# Altium PCB Ninja_ECU_PCB.PcbDoc (part 1 of 3)
Units mm, origin at the board's own origin, x right, y up, seen from the top; angles counter-clockwise.
Board outline 80.01 x 89.03 mm, 4 copper layers (Top Layer, Signal Layer 1, Signal Layer 2, Bottom Layer), stack 0.778 mm thick; 215 components, 159 nets, 825 pads, 332 vias.
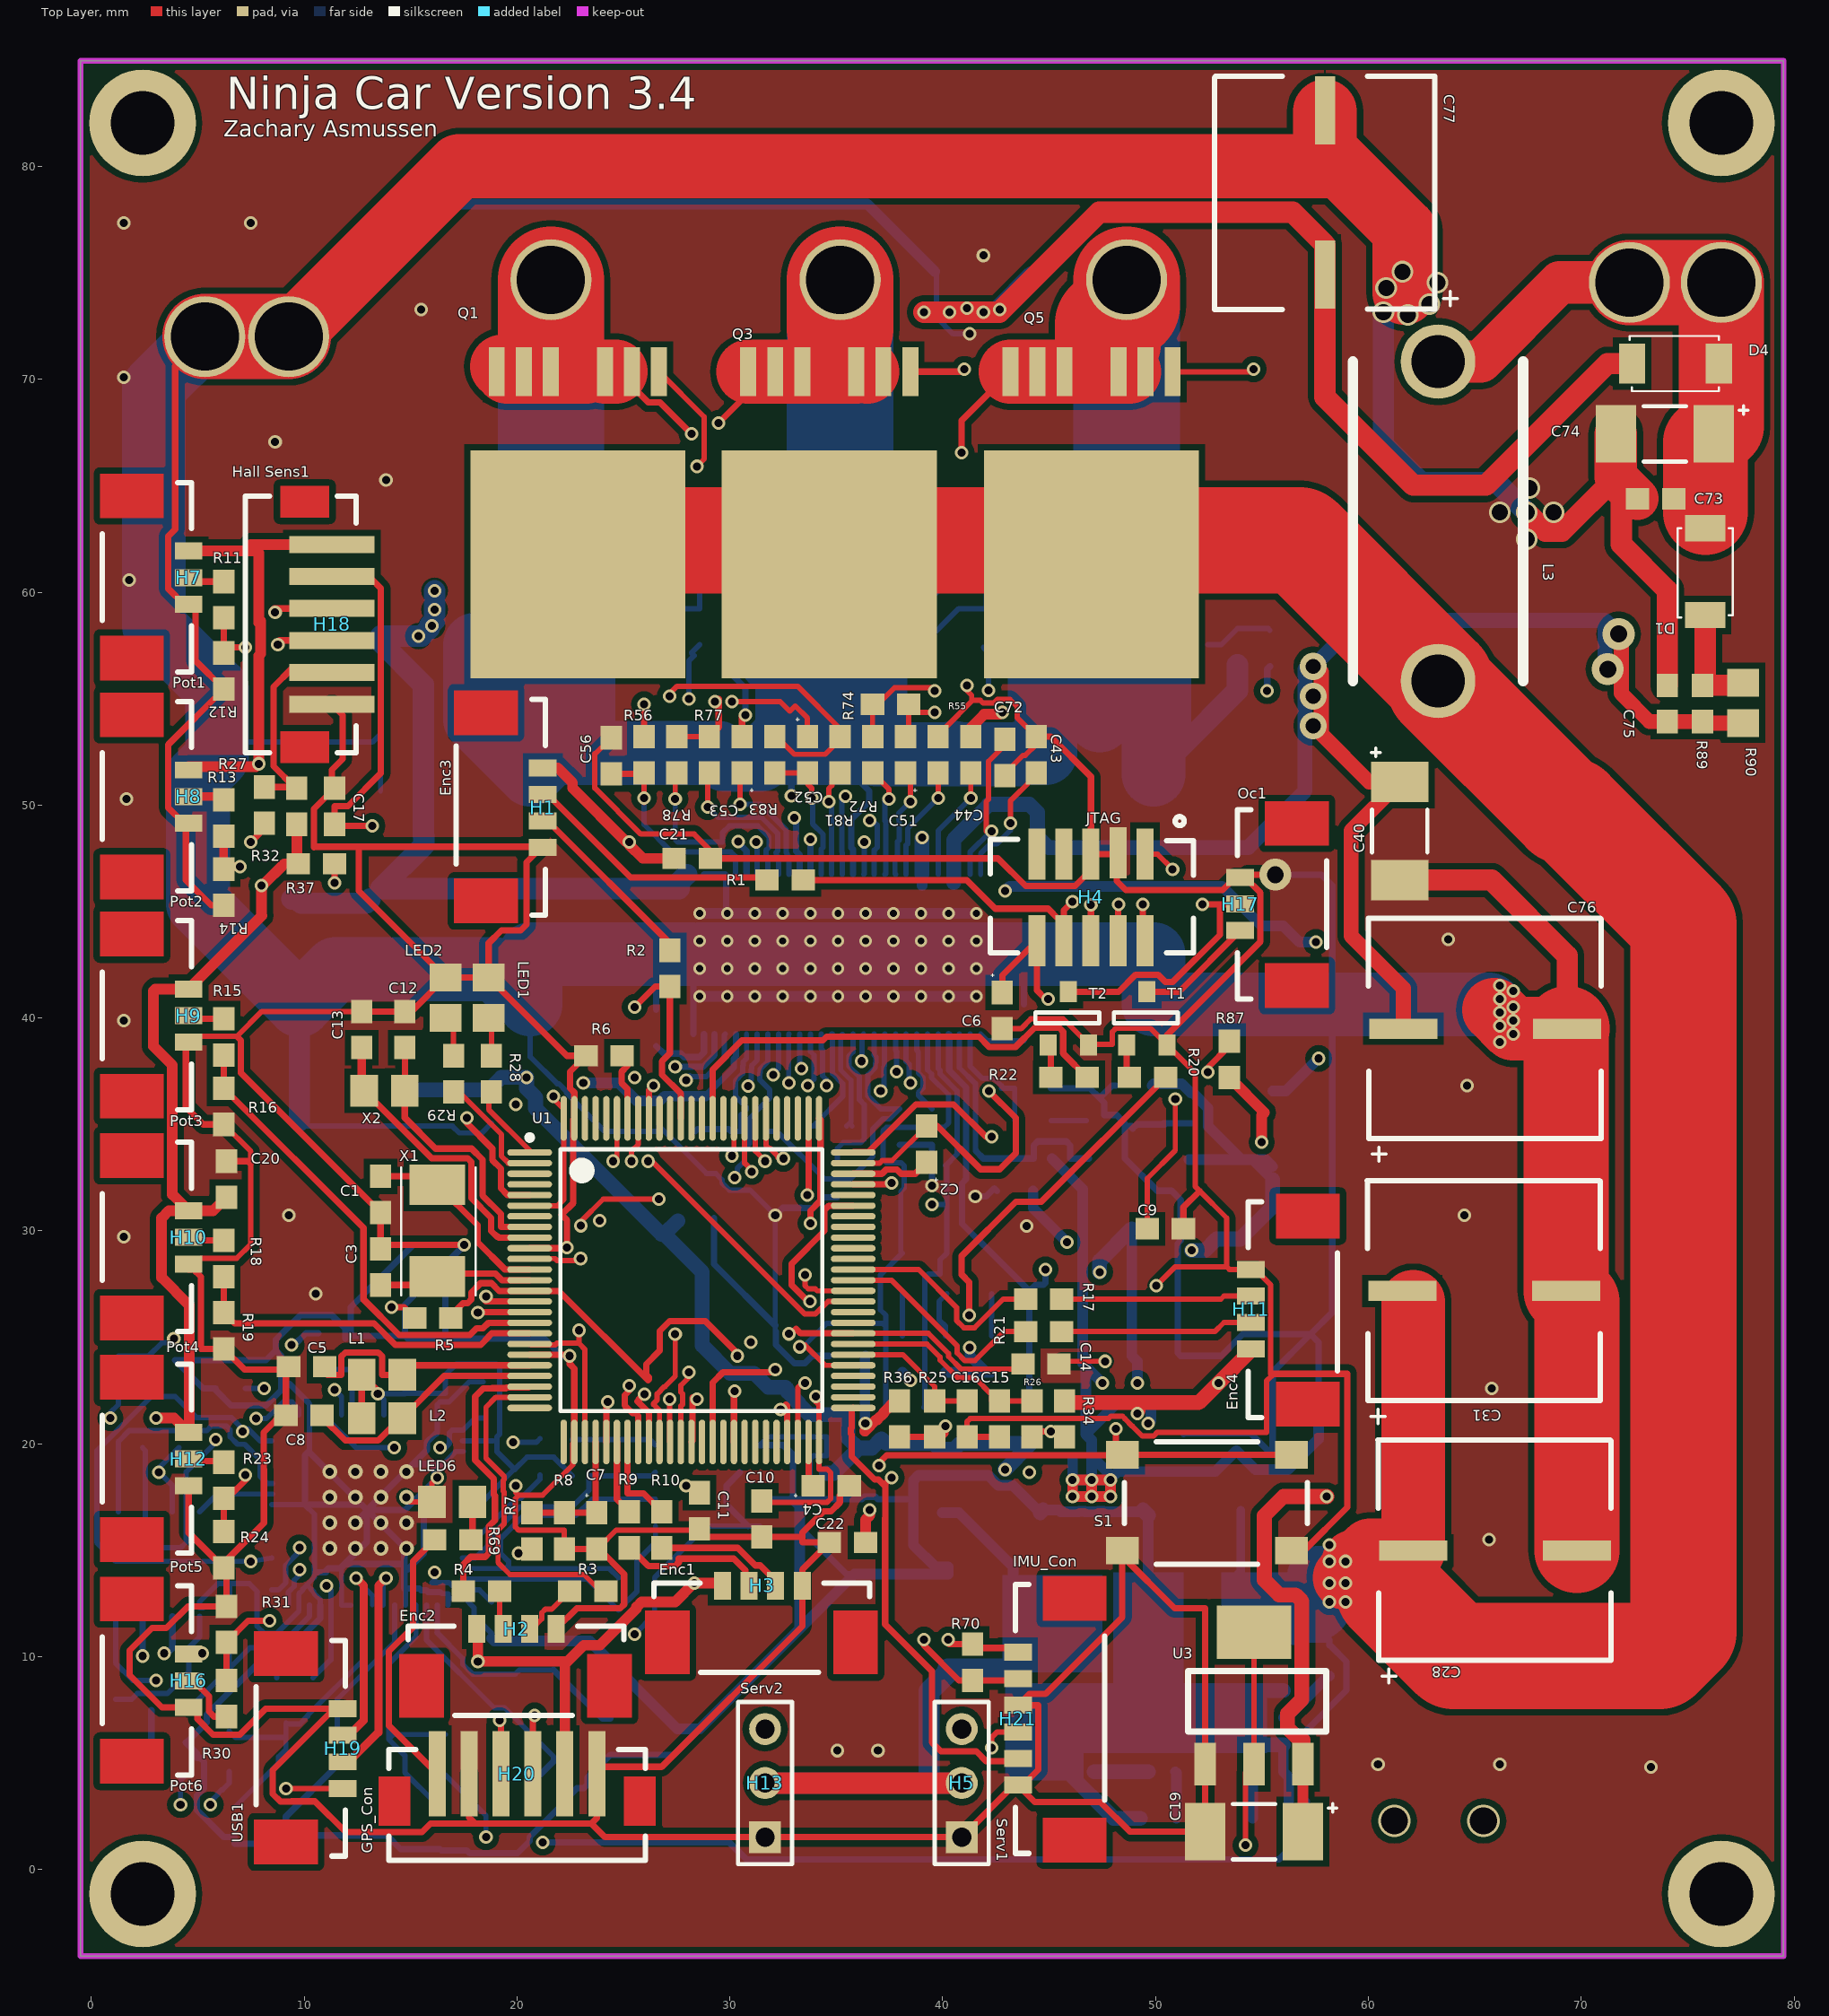
[diagram p0: Top Layer view]
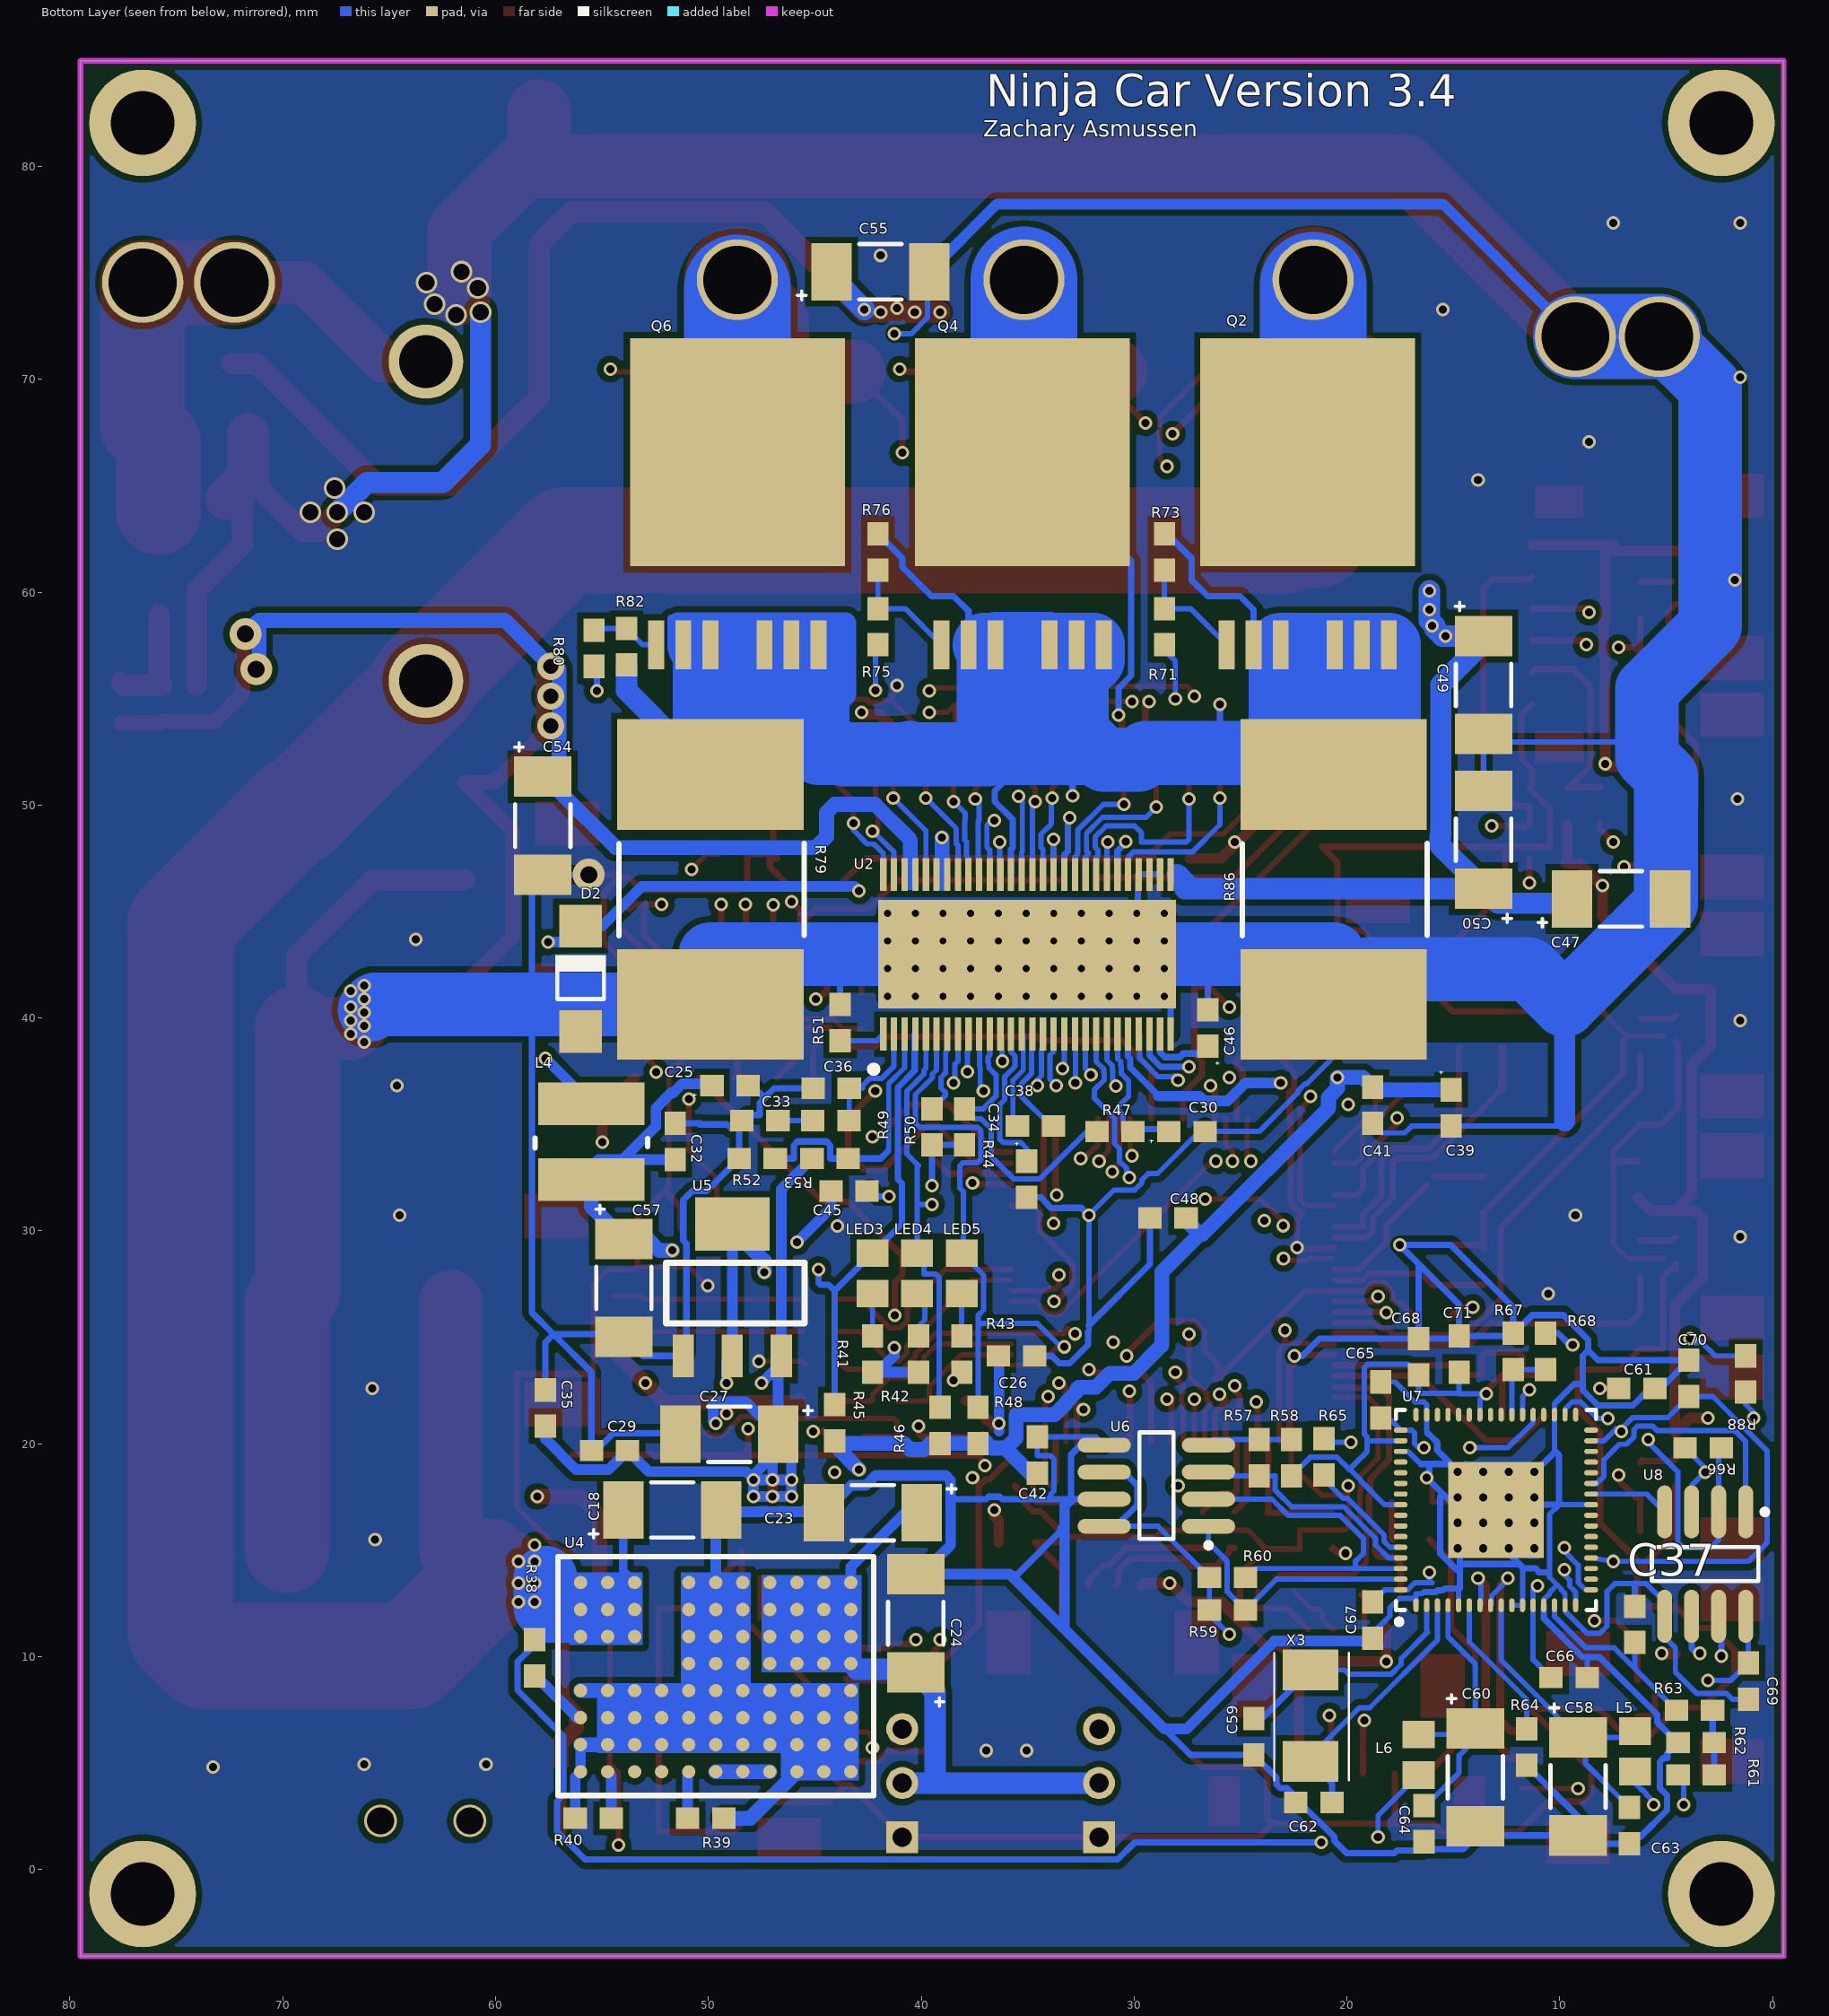
[diagram p1: Bottom Layer view, seen from below]
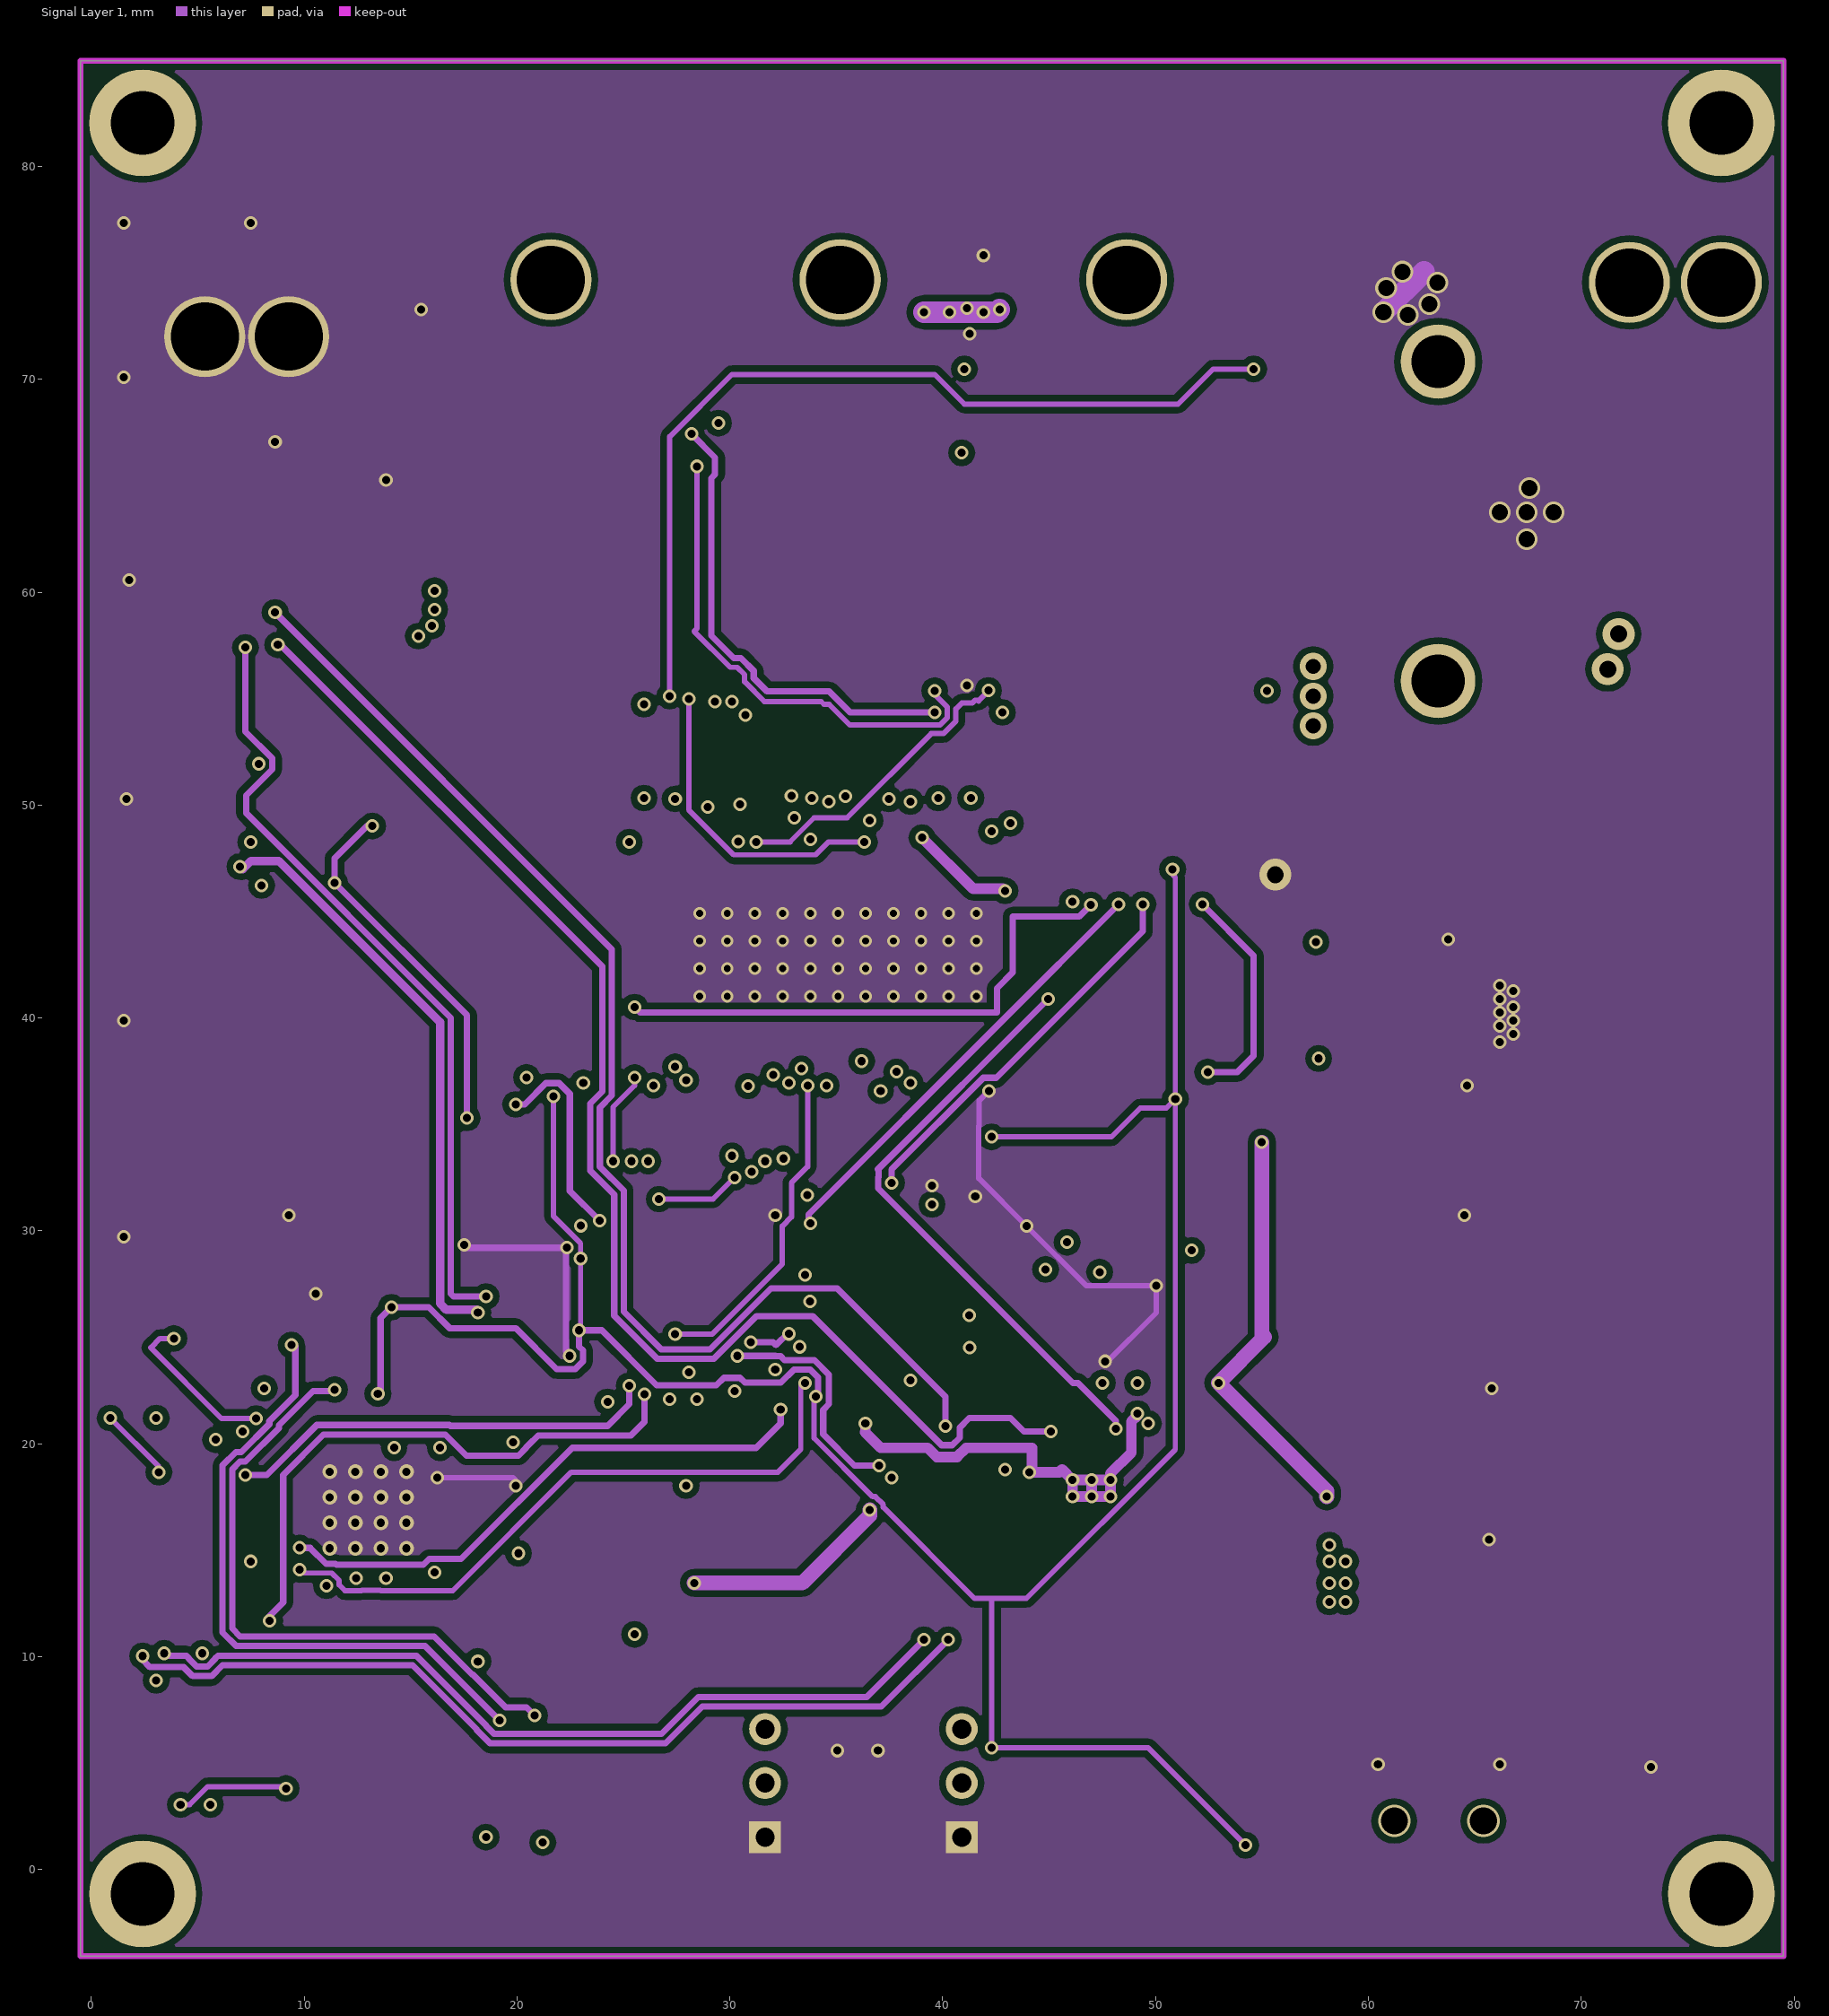
[diagram p2: Signal Layer 1]
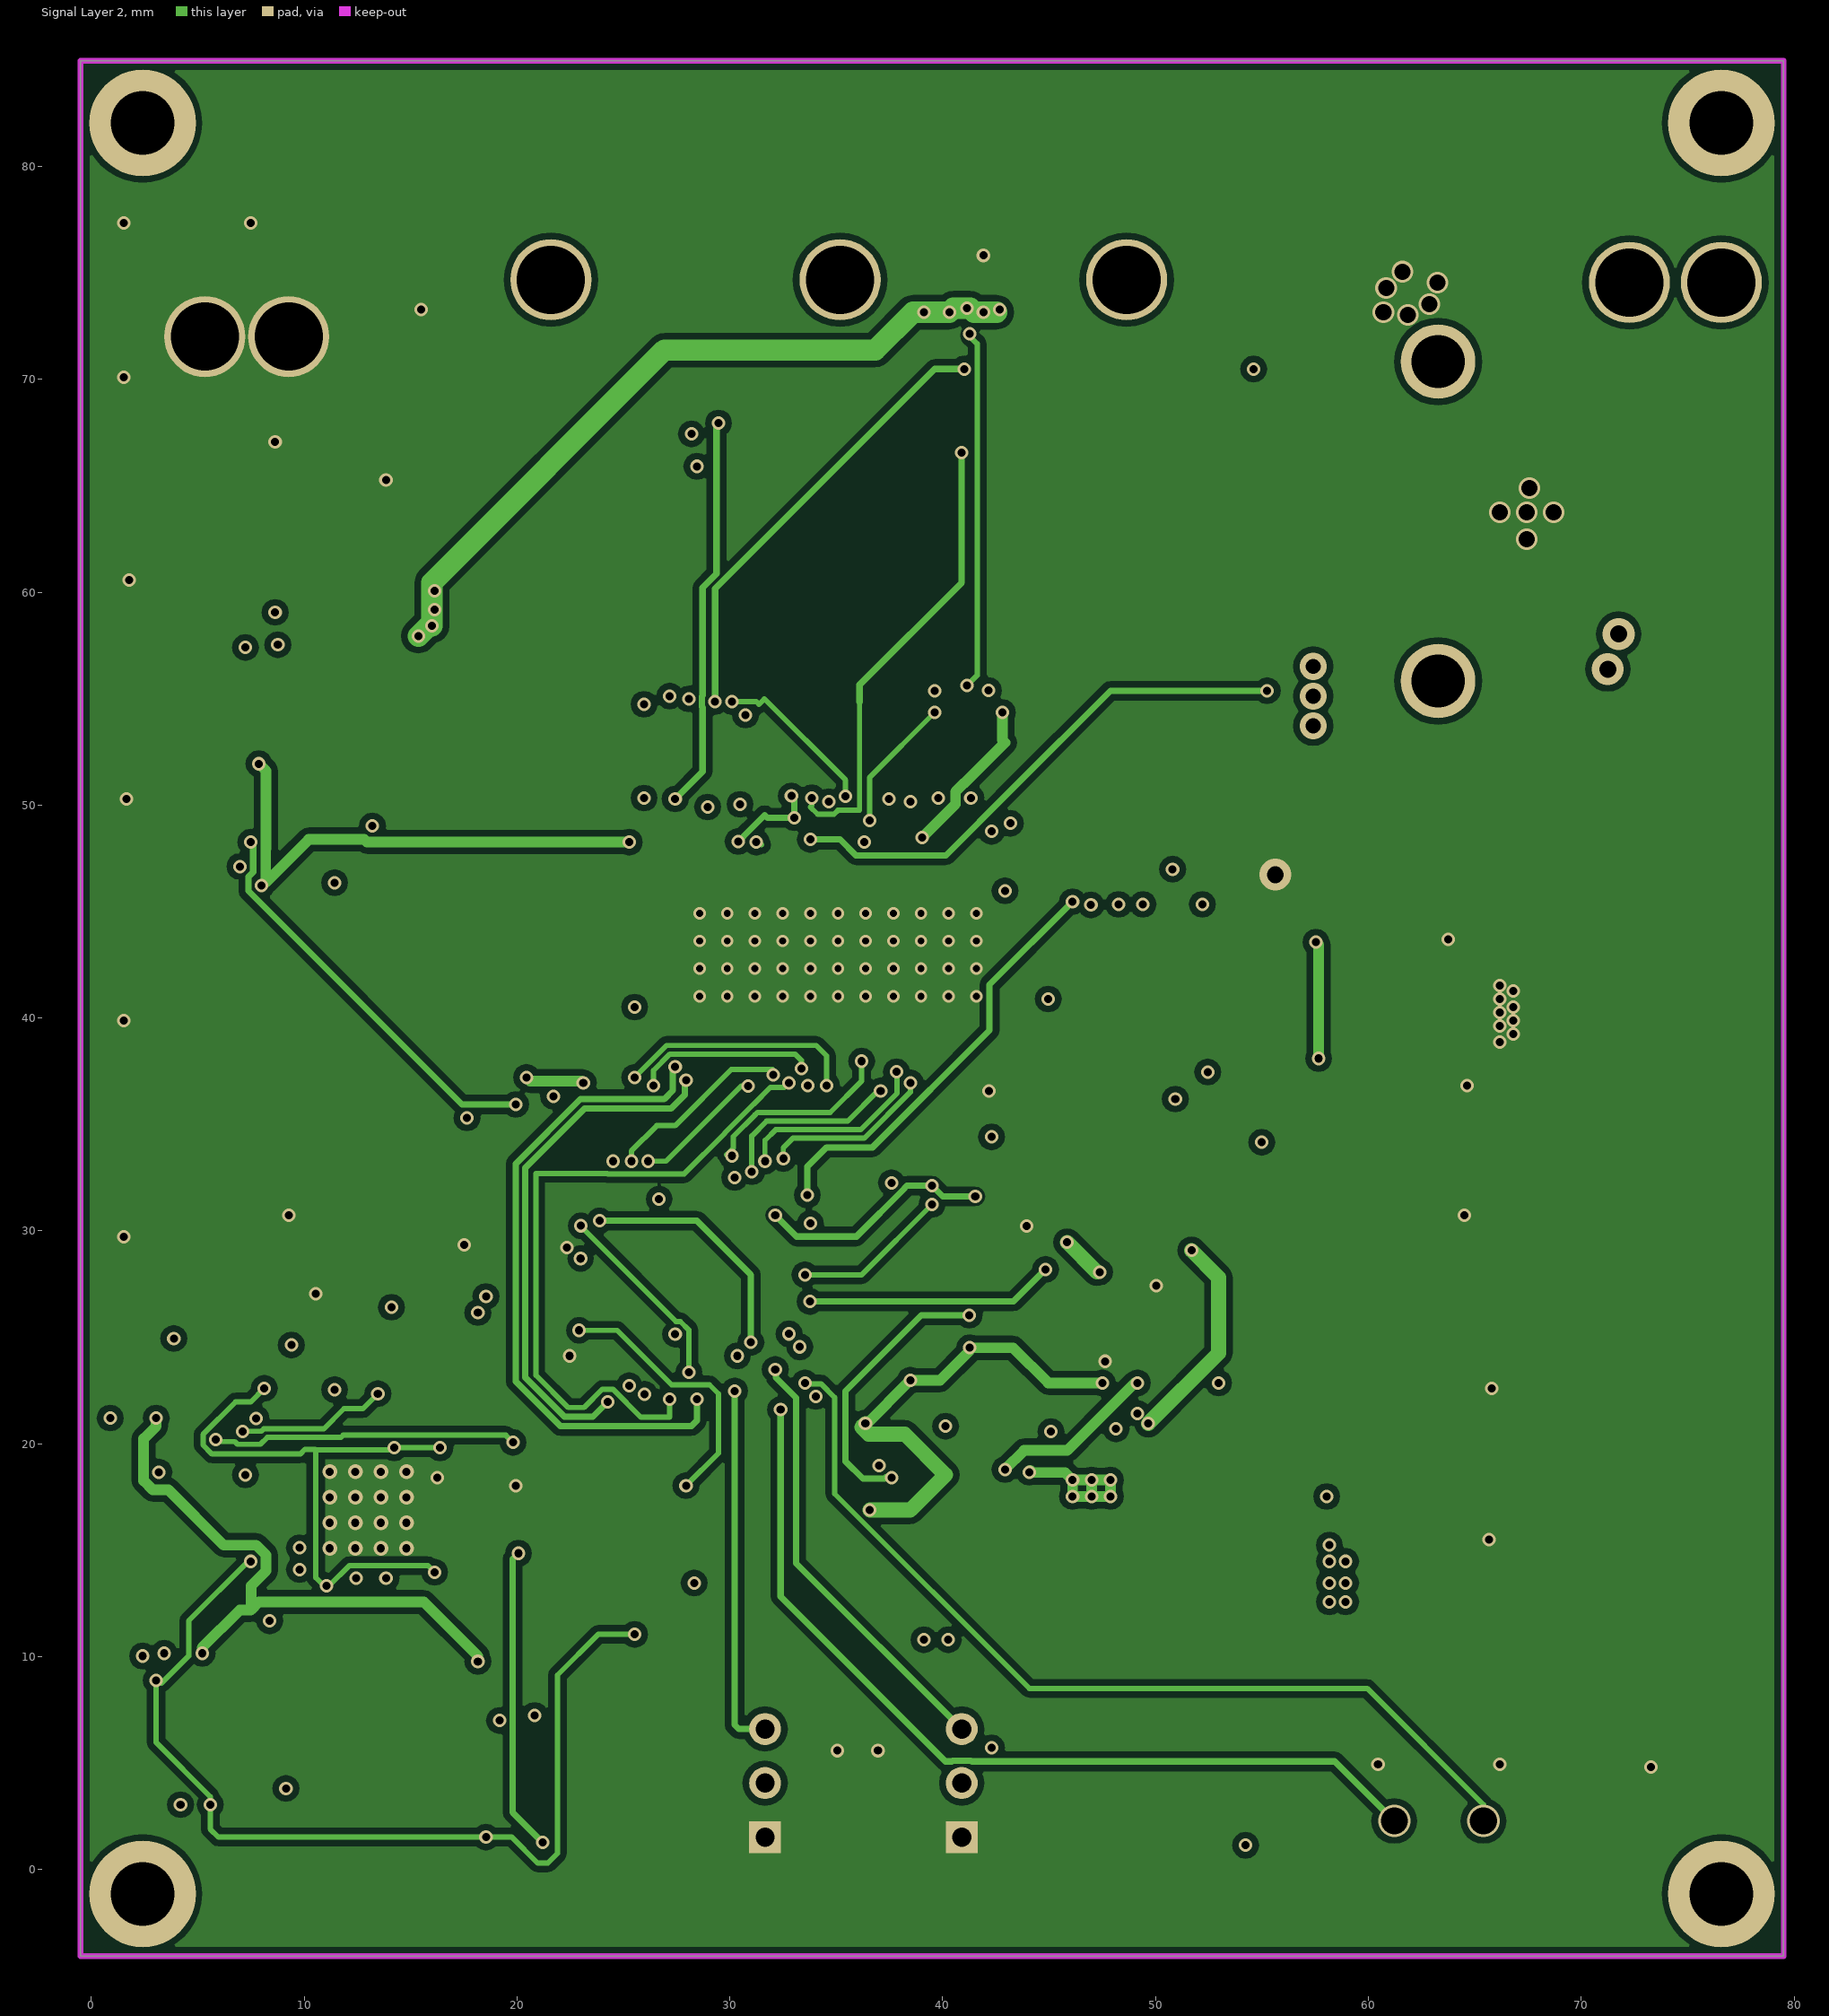
[diagram p3: Signal Layer 2]

## Layer stack, top to bottom
Top Solder: solder mask 0.0102, Solder Resist, Dk 3.5
Top Layer: signal copper 0.0356
Dielectric 1: core 0.254, FR-4, Dk 4.2
Signal Layer 1: signal copper 0.036
Dielectric 3: prepreg 0.127, FR-4, Dk 4.2
Signal Layer 2: signal copper 0.036
Dielectric 2: core 0.254, FR-4, Dk 4.2
Bottom Layer: signal copper 0.0356
Bottom Solder: solder mask 0.0102, Solder Resist, Dk 3.5

## Board outline
-0.508,-4.064 79.502,-4.064 79.502,84.963 -0.508,84.963

## Design rules (kind name [scope] priority, off if disabled: settings)
AssemblyTestPointUsage [All] p1 off:
AssemblyTestpoint [All] p1 off: testpointundercomponent=TRUE minsize=1.016 maxsize=2.54 preferedsize=1.524 minholesize=0 maxholesize=1.016 preferedholesize=0.813 testpointgrid=0.025 usegrid=TRUE gridtolerance=0 allowsidetop=TRUE allowsidebottom=TRUE
Clearance [All] p1: gap=0.152 except(0.3: Arc-Poly Track-Poly SMDPad-Poly THPad-Poly Via-Poly Fill-Poly Poly-Poly)
DiffPairsRouting [All] p1: maxlimit=0.5 minlimit=0.152 mostfreqgap=0.3 toplayer_minwidth=0.2 toplayer_maxwidth=0.381 toplayer_prefwidth=0.381 midlayer1_minwidth=0.2 midlayer1_maxwidth=0.381 midlayer1_prefwidth=0.381 midlayer2_minwidth=0.2 midlayer2_maxwidth=0.381 midlayer2_prefwidth=0.381 bottomlayer_minwidth=0.2 bottomlayer_maxwidth=0.381 bottomlayer_prefwidth=0.381 maxuncoupledlength=12.7
FabricationTestPointUsage [All] p1 off: valid=0 allowmultiple=FALSE
FabricationTestpoint [All] p1 off: side=3 testpointundercomponent=TRUE minsize=1.016 maxsize=2.54 preferedsize=1.524 minholesize=0 maxholesize=1.016 preferedholesize=0.813 testpointgrid=0.025 allowsidetop=TRUE allowsidebottom=TRUE usegrid=TRUE gridtolerance=0
FanoutControl Fanout_BGA [IsBGA] p1 off: bgadir=Out bgaviamode=Centered fanoutstyle=Auto fanoutdirection=Alternating viagrid=0.025 // Fanout_BGA (Default Rule)
FanoutControl Fanout_LCC [IsLCC] p2 off: bgadir=Out bgaviamode=Centered fanoutstyle=Auto fanoutdirection=Alternating viagrid=0.025 // Fanout_LCC (Default Rule)
FanoutControl Fanout_SOIC [IsSOIC] p3 off: bgadir=Out bgaviamode=Centered fanoutstyle=Auto fanoutdirection=Alternating viagrid=0.025 // Fanout_SOIC (Default Rule)
FanoutControl Fanout_Small [(CompPinCount < 5)] p4 off: bgadir=Out bgaviamode=Centered fanoutstyle=Auto fanoutdirection=OutThenIn viagrid=0.025 // Fanout_Small (Default Rule)
FanoutControl Fanout_Default [All] p5 off: bgadir=Out bgaviamode=Centered fanoutstyle=Auto fanoutdirection=Alternating viagrid=0.025 // Fanout_Default (Default Rule)
Height [All] p1 off: minheight=0 maxheight=25.4 prefheight=12.7
HoleSize [All] p1: absolutevalues=TRUE maxlimit=5 minlimit=0.3 maxpercent=80.000 minpercent=20.000
MinimumAnnularRing [All] p1: minimumring=0.127
MinimumSolderMaskSliver [All] p1 off: minsoldermaskwidth=0.3
PasteMaskExpansion [All] p1 off: expansion=0
PolygonConnect PolygonConnect_1 [InNet('GND_STM')] p1: connectstyle=Direct reliefconductorwidth=0.5 reliefentries=4 polygonreliefangle="90 Angle" airgapwidth=0.254
PolygonConnect [All] p2: connectstyle=Relief reliefconductorwidth=0.254 reliefentries=4 polygonreliefangle="90 Angle" airgapwidth=0.254
RoutingCorners [All] p1 off: cornerstyle=45-Degree minsetback=2.54 maxsetback=2.54
RoutingPriority [All] p1 off: routingpriority=0
RoutingTopology [All] p1 off: topology=Shortest
RoutingVias [All] p1: holewidth=0.8 width=1.5 viastyle="Through Hole" minholewidth=0.3 minwidth=0.559 maxholewidth=5 maxwidth=2
SilkToSilkClearance [All] p1 off: silktosilkclearance=0.254
SilkToSolderMaskClearance [IsPad] p1: minsilkscreentomaskgap=0.05 clearancetoexposedcopper=TRUE
SolderMaskExpansion [All] p1: expansion=0.102
UnConnectedPin [All] p1 off:
UnpouredPolygon [All] p1 off:
Width "Schematic Width Constraint_6" [InNet('5V_IRFS')] p1: maxlimit=1 minlimit=0.5 preferedwidth=0.7
Width "Schematic Width Constraint_4" [InNet('NetC44_2')] p2: maxlimit=1 minlimit=0.5 preferedwidth=0.7
Width "Schematic Width Constraint_1" [InNet('5V_IRFS')] p3: maxlimit=1 minlimit=0.5 preferedwidth=0.7
Width "Schematic Width Constraint" [InNet('5V_SERVO')] p4: maxlimit=1 minlimit=0.5 preferedwidth=0.7
Width "Schematic Width Constraint_5" [InNet('PVDD2')] p5: maxlimit=1 minlimit=0.5 preferedwidth=0.7
Width "Schematic Width Constraint_3" [InNet('V_BATT')] p6: maxlimit=5 minlimit=0.5 preferedwidth=0.7
Width "Schematic Width Constraint_2" [InNet('3V3_IRFS')] p7: maxlimit=1 minlimit=0.3 preferedwidth=0.7
Width [All] p8: maxlimit=5 minlimit=0.229 preferedwidth=0.3
10 further rules are at their usual default settings.

## Classes and differential pairs
component class FT4232_USB: C37 C58 C59 C60 C61 C62 C63 C64 C65 C66 C67 C68 C69 C70 C71 H19 H20 H21 L5 L6 LED6 R57 R58 R59 R60 R61 R62 R63 R64 R65 R66 R67 R68 R69 R70 R88 U6 U7 U8 X3
component class IRFS7530_Driver: C25 C26 C27 C28 C29 C30 C31 C32 C33 C34 C35 C36 C38 C39 C40 C41 C42 C43 C44 C45 C46 C47 C48 C49 C50 C51 C52 C53 C54 C55 C56 C57 C72 C73 C74 C75 C76 C77 D1 D2 D4 L4 LED3 LED4 LED5 R41 R42 R43 R44 R45 R46 R47 R48 R49 R50 R51 R52 R53 R55 R56 R89 R90 U2 U5
component class IRFS_Bridges: Q1 Q2 Q3 Q5 Q6 R71 R72 R73 R74 R75 R76 R77 R78 R79 R80 R81 R82 R83 R86
component class STM32_Microcontroller: .3 C1 C2 C3 C4 C5 C6 C7 C8 C9 C10 C11 C12 C13 C14 C15 C16 C17 C18 C19 C20 C21 C22 C23 C24 H1 H2 H3 H4 H5 H7 H8 H9 H10 H11 H12 H13 H16 H17 H18 L1 L2 LED1 LED2 R1 R2 R3 R4 R5 R6 R7 R8 R9 R10 R11 R12 R13 R14 R15 R16 R17 R18 R19 R20 R21 R22 R23 R24 R25 R26 R27 R28 R29 R30 R31 R32 R34 R36 R37 R38 R39 R40 R87 S1 T1 T2 U1 U3 U4 X1 X2
differential pair USB: +USB_P -USB_N

## Components (designator, comment, footprint, x,y, rotation, side; value= is the part's Value field where it differs from the comment)
C1 "18pF" 1608[0603] 13.589,30.861 r90 top
C2 "2.2uF" "1608[0603] - Polar" 39.243,34.925 r270 top
C3 "18pF" 1608[0603] 13.589,29.161 r270 top
C4 "2.2uF" "1608[0603] - Polar" 35.609,18.034 r180 top
C5 "100nF" 1608[0603] 9.271,23.622 r0 top
C6 "2.2uF" "1608[0603] - Polar" 42.799,39.497 r90 top
C7 "2.2uF" "1608[0603] - Polar" 23.749,15.064 r90 top
C8 "100nF" 1608[0603] 9.144,21.336 r0 top
C9 "100nF" 1608[0603] 51.308,30.099 r180 top
C10 "100nF" 1608[0603] 31.496,15.621 r90 top
C11 "100nF" 1608[0603] 28.575,16.002 r90 top
C12 "15pF" 1608[0603] 14.732,38.608 r90 top
C13 "15pF" 1608[0603] 12.7,38.608 r90 top
C14 "4.7nF" 1608[0603] 45.466,23.749 r180 top
C15 "4.7nF" 1608[0603] 42.672,20.32 r90 top
C16 "4.7nF" 1608[0603] 41.148,20.32 r90 top
C17 "4.7nF" 1608[0603] 11.43,50.8 r270 top
C18 "10uF" "6032 [2312]" 49.403,16.891 r0 bottom
C19 "150uF" "6032 [2312]" 52.324,1.778 r0 top
C20 "100nF" 1608[0603] 6.35,33.274 r270 top
C21 "100nF" 1608[0603] 29.083,47.498 r180 top
C22 "100nF" 1608[0603] 34.671,15.367 r0 top
C23 "100uF" "6032 [2312]" 44.577,16.764 r180 bottom
C24 "330uF" "6032 [2312]" 40.259,13.871 r270 bottom
C25 "2.2uF" "1608[0603] - Polar" 48.133,36.83 r0 bottom
C26 "100pF" 1608[0603] 34.671,24.13 r0 bottom
C27 "150uF/6.3V" "6032 [2312]" 51.322,20.447 r180 bottom
C28 "1000uF/16V" Large_SMD_Cap 69.803,14.986 r90 top
C29 "1nF" 1608[0603] 55.499,19.685 r180 bottom
C30 "2.2uF" "1608[0603] - Polar" 26.67,34.671 r0 bottom
C31 "1000uF/16V" Large_SMD_Cap 69.295,27.178 r90 top
C32 "10nF" 1608[0603] 51.562,35.052 r270 bottom
C33 "6.8nF" 1608[0603] 48.436,35.179 r180 bottom
C34 "2.2uF" "1608[0603] - Polar" 35.052,31.574 r90 bottom
C35 "100nF" 1608[0603] 57.658,20.828 r90 bottom
C36 "120pF" 1608[0603] 45.085,36.703 r180 bottom
C37 "100nF" 1608[0603] 6.477,10.668 r90 bottom
C38 "22nF" 1608[0603] 33.782,34.925 r0 bottom
C39 "2.2uF" "1608[0603] - Polar" 15.113,34.925 r90 bottom
C40 "100uF" "6032 [2312]" 61.468,46.482 r90 top
C41 "100pF" 1608[0603] 18.796,35.052 r90 bottom
C42 "1nF" 1608[0603] 34.544,20.32 r270 bottom
C43 "15nF" 1608[0603] 44.391,53.213 r270 top
C44 "100nF" 1608[0603] 41.32,51.513 r90 top
C45 "10nF" 1608[0603] 42.545,31.877 r0 bottom
C46 "2.2uF" "1608[0603] - Polar" 26.543,40.386 r270 bottom
C47 "10uF" "6032 [2312]" 4.826,45.593 r0 bottom
C48 "100nF" 1608[0603] 27.559,30.607 r0 bottom
C49 "10uF" "6032 [2312]" 13.589,53.34 r90 bottom
C50 "10uF" "6032 [2312]" 13.589,50.673 r270 bottom
C51 "2.2uF" "1608[0603] - Polar" 38.25,53.213 r270 top
C52 "2.2uF" "1608[0603] - Polar" 33.644,51.513 r90 top
C53 "2.2uF" "1608[0603] - Polar" 30.573,53.213 r270 top
C54 "10uF" "6032 [2312]" 57.785,46.736 r90 bottom
C55 "220uF/16V" "6032 [2312]" 39.624,75.057 r0 bottom
C56 "100nF" 1608[0603] 24.432,53.164 r270 top
C57 "100uF" "6032 [2312]" 53.975,25.019 r90 bottom
C58 "4.7uF" "6032 [2312]" 9.144,1.604 r90 bottom
C59 "27pF" 1608[0603] 24.384,7.094 r270 bottom
C60 "4.7uF" "6032 [2312]" 13.97,2.032 r90 bottom
C61 "3.3uF" 1608[0603] 7.239,22.606 r180 bottom
C62 "27pF" 1608[0603] 20.701,3.157 r0 bottom
C63 "100nF" 1608[0603] 6.731,2.921 r270 bottom
C64 "100nF" 1608[0603] 16.383,3.009 r270 bottom
C65 "100nF" 1608[0603] 18.415,21.209 r90 bottom
C66 "100nF" 1608[0603] 10.414,9.017 r180 bottom
C67 "100nF" 1608[0603] 18.796,12.573 r270 bottom
C68 "100nF" 1608[0603] 16.637,23.241 r90 bottom
C69 "100nF" 1608[0603] 1.143,9.701 r270 bottom
C70 "100nF" 1608[0603] 3.937,22.225 r90 bottom
C71 "100nF" 1608[0603] 14.732,23.368 r90 bottom
C72 "1uF" 1608[0603] 42.926,53.086 r270 top
C73 "100nF" 1608[0603] 74.344,64.389 r180 top
C74 "100uF" "6032 [2312]" 71.628,67.437 r0 top
C75 "100nF" 1608[0603] 74.041,53.926 r90 top
C76 "1000uF" Large_SMD_Cap 69.342,39.497 r90 top
C77 "1000uF" Large_SMD_Cap 57.959,82.63 r180 top
D1 "FSV330AF" FSV330AF/FSV340AF 75.819,63.008 r270 top
D2 "1N5819" DIODE-3 56.007,39.37 r90 bottom
D4 "FSV330AF" FSV330AF/FSV340AF 76.47,70.739 r180 top
H1 "Enc3" "Header 4  -MolexPicoBlade" 21.209,48.006 r90 top
H2 "Enc2" "Header 4  -MolexPicoBlade" 21.844,11.303 r180 top
H3 "Enc1" "Header 4  -MolexPicoBlade" 33.401,13.335 r180 top
H4 "JTAG" HDR-2*5-0.05_Without_Through_Hole 47.117,45.847 r0 top
H5 "Serv1" HDR1X3 40.894,1.524 r90 top
H7 "Pot1" "Header 3  -MolexPicoBlade" 4.572,59.436 r90 top
H8 "Pot2" "Header 3  -MolexPicoBlade" 4.572,49.149 r90 top
H9 "Pot3" "Header 3  -MolexPicoBlade" 4.572,38.862 r90 top
H10 "Pot4" "Header 3  -MolexPicoBlade" 4.572,28.448 r90 top
H11 "Enc4" "Header 4  -MolexPicoBlade" 54.483,28.194 r270 top
H12 "Pot5" "Header 3  -MolexPicoBlade" 4.572,18.034 r90 top
H13 "Serv2" HDR1X3 31.655,1.524 r90 top
H16 "Pot6" "Header 3  -MolexPicoBlade" 4.572,7.62 r90 top
H17 "Oc1" "Header 3  -MolexPicoBlade" 53.975,46.609 r270 top
H18 "Hall Sens1" "Header 6  ZH-SM4" 11.303,54.737 r90 top
H19 "USB1" "Header 4  -MolexPicoBlade" 11.811,3.81 r90 top
H20 "GPS_Con" "Header 6  ZH-SM4" 23.749,4.494 r180 top
H21 "IMU_Con" "Header 6  -MolexPicoBlade" 46.228,11.176 r270 top
L1 "10uH" 0805 14.605,23.241 r180 top
L2 "10uH" 0805 14.605,21.209 r180 top
L3 "DNI" Toroid 63.273,55.834 r90 top
L4 "22uH" VLC2 52.959,36.979 r0 bottom
L5 "?H" 0805 6.477,4.604 r90 bottom
L6 "?H" 0805 16.637,4.445 r90 bottom
LED1 "LEDR" 2012[0805] 18.669,40.005 r90 top
LED2 "LEDY" 2012[0805] 16.637,40.005 r90 top
LED3 "LEDG" 2012[0805] 42.295,27.056 r90 bottom
LED4 "LEDY" 2012[0805] 40.195,27.056 r90 bottom
LED5 "LEDR" 2012[0805] 38.1,27.056 r90 bottom
LED6 "LEDR" 2012[0805] 17.907,17.272 r180 top
Q1 "IRFS7530" D2PAK-7Pin 26.67,70.358 r180 top
Q2 "IRFS7530" D2PAK-7Pin 25.654,57.531 r180 bottom
Q3 "IRFS7530" D2PAK-7Pin 38.481,70.358 r180 top
Q4 "IRFS7530" D2PAK-7Pin 39.052,57.531 r180 bottom
Q5 "IRFS7530" D2PAK-7Pin 50.8,70.358 r180 top
Q6 "IRFS7530" D2PAK-7Pin 52.451,57.531 r180 bottom
R1 "120" 1608[0603] 31.75,46.482 r0 top
R2 "120" 1608[0603] 27.178,43.18 r270 top
R3 "120" 1608[0603] 22.479,13.081 r0 top
R4 "120" 1608[0603] 19.177,13.081 r180 top
R5 "4.7K" 1608[0603] 16.891,25.908 r180 top
R6 "4.7K" 1608[0603] 23.241,38.227 r0 top
R7 "4.7K" 1608[0603] 20.701,16.764 r270 top
R8 "1K" 1608[0603] 22.225,16.764 r270 top
R9 "120" 1608[0603] 25.273,15.113 r90 top
R10 "120" 1608[0603] 26.797,15.113 r90 top
R11 "180" 1608[0603] 6.223,58.801 r90 top
R12 "330" 1608[0603] 6.223,57.15 r270 top
R13 "180" 1608[0603] 6.223,48.549 r90 top
R14 "330" 1608[0603] 6.223,46.99 r270 top
R15 "180" 1608[0603] 6.223,38.262 r90 top
R16 "330" 1608[0603] 6.223,36.703 r270 top
R17 "120" 1608[0603] 45.593,26.797 r180 top
R18 "180" 1608[0603] 6.223,27.848 r90 top
R19 "330" 1608[0603] 6.223,26.162 r270 top
R20 "470" 1608[0603] 48.768,37.211 r0 top
R21 "120" 1608[0603] 45.593,25.273 r180 top
R22 "470" 1608[0603] 45.085,37.211 r0 top
R23 "180" 1608[0603] 6.223,17.434 r90 top
R24 "330" 1608[0603] 6.223,15.875 r270 top
R25 "10K" 1608[0603] 39.624,22.02 r270 top
R26 "10K" 1608[0603] 44.196,22.02 r270 top
R27 "10K" 1608[0603] 8.128,49.149 r90 top
R28 "330" 1608[0603] 18.796,38.227 r270 top
R29 "330" 1608[0603] 17.018,38.227 r270 top
R30 "180" 1608[0603] 6.35,8.89 r270 top
R31 "330" 1608[0603] 6.35,10.668 r90 top
R32 "2.2K" 1608[0603] 9.652,50.8 r270 top
R34 "2.2K" 1608[0603] 45.72,20.32 r90 top
R36 "2.2K" 1608[0603] 37.973,20.32 r90 top
R37 "560" 1608[0603] 11.43,47.244 r180 top
R38 "510K" 1608[0603] 58.166,10.795 r270 bottom
R39 "90.9K" 1608[0603] 49.276,2.413 r0 bottom
R40 "3.09K" 1608[0603] 56.261,2.413 r180 bottom
R41 "330" 1608[0603] 42.291,23.368 r90 bottom
R42 "330" 1608[0603] 40.132,23.368 r90 bottom
R43 "330" 1608[0603] 38.1,23.368 r90 bottom
R44 "DNI" 1608[0603] 37.973,34.036 r90 bottom
R45 "10K" 1608[0603] 44.069,21.844 r270 bottom
R46 "10K" 1608[0603] 39.116,21.717 r270 bottom
R47 "330K" 1608[0603] 31.75,34.671 r180 bottom
R48 "10K" 1608[0603] 37.338,21.717 r270 bottom
R49 "15K" 1608[0603] 43.395,35.179 r0 bottom
R50 "10K" 1608[0603] 39.497,34.036 r90 bottom
R51 "220K" 1608[0603] 43.815,40.64 r270 bottom
R52 "3.3K" 1608[0603] 46.863,33.401 r0 bottom
R53 "18K" 1608[0603] 43.434,33.401 r0 bottom
R55 "1M" 1608[0603] 39.785,51.513 r90 top
R56 "18K" 1608[0603] 25.967,51.513 r90 top
R57 "2.2K" 1608[0603] 24.13,20.193 r270 bottom
R58 "10K" 1608[0603] 22.606,20.193 r270 bottom
R59 "10K" 1608[0603] 24.765,12.192 r0 bottom
R60 "10K" 1608[0603] 24.765,13.716 r0 bottom
R61 "4.7K" 1608[0603] 2.745,4.445 r0 bottom
R62 "10K" 1608[0603] 4.445,5.969 r180 bottom
R63 "1K" 1608[0603] 4.523,7.488 r180 bottom
R64 "12K" 1608[0603] 11.557,6.604 r270 bottom
R65 "DNI" 1608[0603] 21.082,18.542 r90 bottom
R66 "DNI" 1608[0603] 4.113,19.812 r180 bottom
R67 "560" 1608[0603] 12.192,25.195 r270 bottom
R68 "330" 1608[0603] 10.668,23.495 r90 bottom
R69 "120" 1608[0603] 16.129,15.494 r0 top
R70 "120" 1608[0603] 41.402,8.89 r90 top
R71 "4.7" 1608[0603] 28.575,57.531 r90 bottom
R72 "4.7" 1608[0603] 36.714,51.513 r90 top
R73 "39K" 1608[0603] 28.575,61.038 r90 bottom
R74 "39K" 1608[0603] 36.703,54.737 r0 top
R75 "4.7" 1608[0603] 42.037,57.531 r90 bottom
R76 "39K" 1608[0603] 42.037,62.738 r270 bottom
R77 "4.7" 1608[0603] 29.038,51.513 r90 top
R78 "39K" 1608[0603] 27.503,53.213 r270 top
R79 "0.001" 5931 49.905,40.64 r90 bottom
R80 "4.7" 1608[0603] 55.372,56.515 r90 bottom
R81 "4.7" 1608[0603] 35.179,51.513 r90 top
R82 "39K" 1608[0603] 53.848,58.293 r270 bottom
R83 "39K" 1608[0603] 32.108,53.213 r270 top
R86 "0.001" 5931 20.625,40.64 r90 bottom
R87 "470" 1608[0603] 53.467,37.211 r90 top
R88 "DNI" 1608[0603] 1.27,24.13 r270 bottom
R89 "10" 1608[0603] 75.692,53.926 r90 top
R90 "1" 2012[0805] 77.597,53.853 r90 top
S1 "SW_TACT" PTS645SH50SMTR92_LFS 56.388,14.986 r180 top
T1 "BC817" SOT-23 48.641,38.735 r0 top
T2 "BC817" SOT-23 44.958,38.735 r0 top
U1 "STM32F207VCT6" LQFP100_M 28.194,27.686 r0 top
U2 "DRV8302" DRV8302 41.783,39.243 r90 bottom
U3 "1117-3.3" SOT-223 52.324,4.953 r0 top
U4 "LTM8026" LGA_Package 43.307,13.487 r270 bottom
U5 "1117-3.3" SOT-223 51.181,24.13 r180 bottom
U6 "AT93C46DN-SP25-B" 8S1_M 28.956,18.034 r0 bottom
U7 "FT4232HQ-Reel" QFN64_2_L_Smaller_Holes 12.954,16.891 r90 bottom
U8 "MAX3485" SOIC8 3.175,14.351 r270 bottom
X1 "8MHz" ABM7 16.256,32.161 r270 top
X2 "32768 Hz" 0805 12.827,36.576 r0 top
X3 "12MHz" ABM7 21.717,9.38 r270 bottom

## Footprints (in the part's own frame and the unit in brackets; to place one, negate y for a bottom-side part, rotate by r counter-clockwise, add the part's x,y. Pads: shape width x height; smd on the part's side, far side on the other; paste and mask are expansions set on the pad)
8S1_M [mm] "SOIC, 8-Leads, Body 4.9x3.9mm, Pitch 1.27mm, IPC Low Density"
  oval 2.5x0.7 smd: 1(-2.45,1.905) 2(-2.45,0.635) 3(-2.45,-0.635) 4(-2.45,-1.905) 5(2.45,-1.905) 6(2.45,-0.635) 7(2.45,0.635) 8(2.45,1.905)
  silkscreen extent -2.57,-2.5 0.8,2.93, body extent -2,-2.5 2,2.5, height 1.75
0805 [mm]
  rect 1.3x1.5 smd: 1(0,0) 2(1.9,0)
1608[0603] [mm] "Chip Capacitor; Body 1.6 x 0.8 mm (LxW typ)"
  rect 1.1x1 smd: 1(0,0) 2(1.7,0)
"1608[0603] - Polar" [mm] "Chip Capacitor; Body 1.6 x 0.8 mm (LxW typ)"
  rect 1.1x1 smd: 1(0,0) 2(1.7,0)
  silkscreen extent 2.44,0.38 2.59,0.53
2012[0805] [mm]
  rect 1.3x1.5 smd: 1(0,0) 2(1.9,0)
5931 [mm]
  rect 5.2x8.75 smd: 1(0,0) 2(10.8,0)
  silkscreen extent 3.23,-4.39 7.57,4.29
"6032 [2312]" [mm]
  rect 1.9x2.7 smd: 1(0,0) 2(4.6,0)
  silkscreen extent 1.3,-1.3 6.2,1.32
ABM7 [mm]
  rect 1.9x2.6 smd: 1(0,0) 2(4.3,0)
  silkscreen extent -0.81,-1.7 5.19,1.8
D2PAK-7Pin [mm] "Mosfet"
  rect 0.75x2.285 smd: 1(0,0) 3(1.27,0) 3(2.54,0) 3(5.08,0) 3(6.35,0) 3(7.62,0)
  rect 10.095x10.695 smd: 2(3.81,9.042)
DIODE-3 [mm]
  rect 2x2 smd: 1(0,0) 2(4.953,0)
  silkscreen extent 1.52,-1.2 3.6,1.2
DRV8302 [mm]
  rect 1.55x0.3 smd: 1(0,0) 2(0,-0.5) 3(0,-1) 4(0,-1.5) 5(0,-2) 6(0,-2.5) 7(0,-3) 8(0,-3.5) 9(0,-4) 10(0,-4.5) 11(0,-5) 12(0,-5.5) 13(0,-6) 14(0,-6.5) 15(0,-7) 16(0,-7.5) 17(0,-8) 18(0,-8.5) 19(0,-9) 20(0,-9.5) 21(0,-10) 22(0,-10.5) 23(0,-11) 24(0,-11.5) 25(0,-12) 26(0,-12.5) 27(0,-13) 28(0,-13.5) 29(7.5,-13.5) 30(7.493,-13) 31(7.5,-12.5) 32(7.5,-12) 33(7.5,-11.5) 34(7.5,-11) 35(7.5,-10.5) 36(7.5,-10) 37(7.5,-9.5) 38(7.5,-9) 39(7.5,-8.5) 40(7.5,-8) 41(7.5,-7.5) 42(7.5,-7) 43(7.5,-6.5) 44(7.5,-6) 45(7.5,-5.5) 46(7.5,-5) 47(7.5,-4.5) 48(7.5,-4) 49(7.5,-3.5) 50(7.5,-3) 51(7.5,-2.5) 52(7.5,-2) 53(7.5,-1.5) 54(7.5,-1) 55(7.5,-0.5) 56(7.5,0)
  rect 5.1x14 smd paste-10 mask-10: 57(3.75,-6.75)
  silkscreen extent -1.71,0.4 -1.59,0.51
FSV330AF/FSV340AF [mm]
  rect 1.24x1.89 smd: 1(0,0) 2(4.08,0)
  silkscreen extent 0,-1.3 4.19,1.3
HDR1X3 [mm] "Connector; Header; 3 Position"
  rect 1.5x1.5 hole 0.9: 1(0,0)
  round 1.5 hole 0.9: 2(2.54,0) 3(5.08,0)
  silkscreen extent -1.27,-1.27 6.35,1.27
HDR-2*5-0.05_Without_Through_Hole [mm]
  rect 0.8x2.4 smd: 1(2.388,1.854) 2(2.388,-2.21) 3(1.118,1.905) 4(1.118,-2.21) 5(-0.152,1.854) 6(-0.152,-2.21) 7(-1.422,1.854) 8(-1.422,-2.21) 9(-2.692,1.854) 10(-2.692,-2.21)
  silkscreen extent -4.88,-2.79 4.67,3.61
"Header 3  -MolexPicoBlade" [mm]
  rect 0.8x1.3 smd: 1(0,0) 2(1.25,0) 3(2.5,0)
  Top Layer region: 4.039,1.166 6.139,1.166 6.139,4.166 4.039,4.166
  Top Layer region: -3.581,1.166 -1.481,1.166 -1.481,4.166 -3.581,4.166
  silkscreen extent -3.17,-0.13 5.71,4.06
"Header 4  -MolexPicoBlade" [mm]
  rect 0.8x1.3 smd: 1(0,0) 2(1.25,0) 3(2.495,0) 4(3.745,0)
  Top Layer region: 5.283,1.166 7.383,1.166 7.383,4.166 5.283,4.166
  Top Layer region: -3.556,1.166 -1.456,1.166 -1.456,4.166 -3.556,4.166
  silkscreen extent -3.17,-0.13 6.96,4.06
"Header 6  -MolexPicoBlade" [mm]
  rect 0.8x1.3 smd: 1(0.965,-2.692) 2(2.215,-2.692) 3(3.46,-2.692) 4(4.71,-2.692) 5(5.965,-2.692) 6(7.21,-2.692)
  Top Layer region: -2.616,-1.527 -0.516,-1.527 -0.516,1.473 -2.616,1.473
  Top Layer region: 8.738,-1.527 10.838,-1.527 10.838,1.473 8.738,1.473
  silkscreen extent -2.21,-2.82 10.41,1.37
"Header 6  ZH-SM4" [mm]
  rect 0.8x4 smd: 1(0,0) 2(1.5,0) 3(3,0) 4(4.5,0) 5(6,0) 6(7.5,0)
  Top Layer region: -2.769,0.127 -1.269,0.127 -1.269,2.427 -2.769,2.427
  Top Layer region: 8.763,0.127 10.263,0.127 10.263,2.427 8.763,2.427
  silkscreen extent -2.29,-1.14 9.78,4.06
Large_SMD_Cap [mm]
  rect 0.95x3.2 smd: 1(0,0) 2(0,7.7)
  silkscreen extent -6.22,-1.6 5.19,9.35
LGA_Package [mm]
  round 0.63 smd: 1(0,-12.7) 1(0,-11.43) 1(0,-10.16) 1(1.27,-12.7) 1(1.27,-11.43) 1(1.27,-10.16) 1(2.54,-12.7) 1(2.54,-11.43) 1(2.54,-10.16) 2(6.35,-12.7) 3(8.89,-10.16) 4(7.62,-12.7) 5(8.89,-8.89) 6(8.89,-7.62) 7(0,-7.62) 7(0,-6.35) 7(0,-5.08) 7(1.27,-7.62) 7(1.27,-6.35) 7(1.27,-5.08) 7(2.54,-7.62) 7(2.54,-6.35) 7(2.54,-5.08) 7(3.81,-7.62) 7(3.81,-6.35) 7(3.81,-5.08) 7(5.08,-12.7) 7(5.08,-11.43) 7(5.08,-10.16) 7(5.08,-8.89) 7(5.08,-7.62) 7(5.08,-6.35) 7(5.08,-5.08) 7(5.08,-3.81) 7(5.08,-2.54) 7(5.08,-1.27) 7(5.08,0) 7(6.35,-11.43) 7(6.35,-10.16) 7(6.35,-8.89) 7(6.35,-7.62) 7(6.35,-6.35) 7(6.35,-5.08) 7(6.35,-3.81) 7(6.35,-2.54) 7(6.35,-1.27) 7(6.35,0) 7(7.62,-11.43) 7(7.62,-10.16) 7(7.62,-8.89) 7(7.62,-7.62) 7(7.62,-6.35) 7(7.62,-5.08) 7(7.62,-3.81) 7(7.62,-2.54) 7(7.62,-1.27) 7(7.62,0) 7(8.89,-12.7) 7(8.89,-2.54) 7(8.89,-1.27) 7(8.89,0) 8(8.89,-11.43) 9(8.89,-3.81) 10(8.89,-5.08) 11(8.89,-6.35) 12(0,-3.81) 12(0,-2.54) 12(0,-1.27) 12(0,0) 12(1.27,-3.81) 12(1.27,-2.54) 12(1.27,-1.27) 12(1.27,0) 12(2.54,-3.81) 12(2.54,-2.54) 12(2.54,-1.27) 12(2.54,0) 12(3.81,-3.81) 12(3.81,-2.54) 12(3.81,-1.27) 12(3.81,0)
  silkscreen extent -1.22,-13.77 10.01,1.07
LQFP100_M [mm] "Thin QFP, 100-Leads, Body 14x14mm, Pitch 0.5mm, IPC Low Density"
  oval 2.1x0.3 smd: 1(-7.6,6) 2(-7.6,5.5) 3(-7.6,5) 4(-7.6,4.5) 5(-7.6,4) 6(-7.6,3.5) 7(-7.6,3) 8(-7.6,2.5) 9(-7.6,2) 10(-7.6,1.5) 11(-7.6,1) 12(-7.6,0.5) 13(-7.6,0) 14(-7.6,-0.5) 15(-7.6,-1) 16(-7.6,-1.5) 17(-7.6,-2) 18(-7.6,-2.5) 19(-7.6,-3) 20(-7.6,-3.5) 21(-7.6,-4) 22(-7.6,-4.5) 23(-7.6,-5) 24(-7.6,-5.5) 25(-7.6,-6) 51(7.6,-6) 52(7.6,-5.5) 53(7.6,-5) 54(7.6,-4.5) 55(7.6,-4) 56(7.6,-3.5) 57(7.6,-3) 58(7.6,-2.5) 59(7.6,-2) 60(7.6,-1.5) 61(7.6,-1) 62(7.6,-0.5) 63(7.6,0) 64(7.6,0.5) 65(7.6,1) 66(7.6,1.5) 67(7.6,2) 68(7.6,2.5) 69(7.6,3) 70(7.6,3.5) 71(7.6,4) 72(7.6,4.5) 73(7.6,5) 74(7.6,5.5) 75(7.6,6)
  oval 0.3x2.1 smd: 26(-6,-7.6) 27(-5.5,-7.6) 28(-5,-7.6) 29(-4.5,-7.6) 30(-4,-7.6) 31(-3.5,-7.6) 32(-3,-7.6) 33(-2.5,-7.6) 34(-2,-7.6) 35(-1.5,-7.6) 36(-1,-7.6) 37(-0.5,-7.6) 38(0,-7.6) 39(0.5,-7.6) 40(1,-7.6) 41(1.5,-7.6) 42(2,-7.6) 43(2.5,-7.6) 44(3,-7.6) 45(3.5,-7.6) 46(4,-7.6) 47(4.5,-7.6) 48(5,-7.6) 49(5.5,-7.6) 50(6,-7.6) 76(6,7.6) 77(5.5,7.6) 78(5,7.6) 79(4.5,7.6) 80(4,7.6) 81(3.5,7.6) 82(3,7.6) 83(2.5,7.6) 84(2,7.6) 85(1.5,7.6) 86(1,7.6) 87(0.5,7.6) 88(0,7.6) 89(-0.5,7.6) 90(-1,7.6) 91(-1.5,7.6) 92(-2,7.6) 93(-2.5,7.6) 94(-3,7.6) 95(-3.5,7.6) 96(-4,7.6) 97(-4.5,7.6) 98(-5,7.6) 99(-5.5,7.6) 100(-6,7.6)
  silkscreen extent -7.72,-6.15 6.15,6.82, body extent -7,-7 7,7, height 1.6
PTS645SH50SMTR92_LFS [mm] "Tactile switch"
  rect 1.55x1.3 smd: 1(0,0) 1(7.95,0) 2(0,-4.5) 2(7.95,-4.5)
  silkscreen extent -0.74,-5.11 7.85,0.64
QFN64_2_L_Smaller_Holes [mm]
  oval 0.65x0.25 smd: 1(-4.475,3.801) 2(-4.475,3.301) 3(-4.475,2.801) 4(-4.475,2.301) 5(-4.475,1.801) 6(-4.475,1.301) 7(-4.475,0.801) 8(-4.475,0.301) 9(-4.475,-0.199) 10(-4.475,-0.699) 11(-4.475,-1.199) 12(-4.475,-1.699) 13(-4.475,-2.199) 14(-4.475,-2.699) 15(-4.475,-3.199) 16(-4.475,-3.699) 33(4.475,-3.699) 34(4.475,-3.199) 35(4.475,-2.699) 36(4.475,-2.199) 37(4.475,-1.699) 38(4.475,-1.199) 39(4.475,-0.699) 40(4.475,-0.199) 41(4.475,0.301) 42(4.475,0.801) 43(4.475,1.301) 44(4.475,1.801) 45(4.475,2.301) 46(4.475,2.801) 47(4.475,3.301) 48(4.475,3.801)
  oval 0.25x0.65 smd: 17(-3.75,-4.424) 18(-3.25,-4.424) 19(-2.75,-4.424) 20(-2.25,-4.424) 21(-1.75,-4.424) 22(-1.25,-4.424) 23(-0.75,-4.424) 24(-0.25,-4.424) 25(0.25,-4.424) 26(0.75,-4.424) 27(1.25,-4.424) 28(1.75,-4.424) 29(2.25,-4.424) 30(2.75,-4.424) 31(3.25,-4.424) 32(3.75,-4.424) 49(3.75,4.526) 50(3.25,4.526) 51(2.75,4.526) 52(2.25,4.526) 53(1.75,4.526) 54(1.25,4.526) 55(0.75,4.526) 56(0.25,4.526) 57(-0.25,4.526) 58(-0.75,4.526) 59(-1.25,4.526) 60(-1.75,4.526) 61(-2.25,4.526) 62(-2.75,4.526) 63(-3.25,4.526) 64(-3.75,4.526)
  rect 4.5x4.5 smd: 65(0,0.051)
  silkscreen extent -5.37,-4.65 4.7,4.75, body extent -4.55,-4.5 4.55,4.6, height 1
SOIC8 [mm]
  oval 2.5x0.7 smd: 1(-2.45,1.905) 2(-2.45,0.635) 3(-2.45,-0.635) 4(-2.45,-1.905) 5(2.45,-1.905) 6(2.45,-0.635) 7(2.45,0.635) 8(2.45,1.905)
  silkscreen extent -2.57,-2.5 0.8,2.93, body extent -2,-2.5 2,2.5, height 1.75
SOT-23 [mm]
  rect 0.8x1 smd: 1(0,0) 2(1.9,0) 3(0.95,2.5)
  silkscreen extent -0.6,1.02 2.4,1.52
SOT-223 [mm]
  rect 1x2 smd: 1(0,0) 2(2.3,0) 3(4.6,0)
  rect 3.5x2.5 smd: 2(2.3,6.2)
  silkscreen extent -0.8,1.52 5.7,4.37
Toroid [mm]
  round 3.5 hole 2.5: 1(0,0) 2(15,0)
  silkscreen extent 0,-4 15,4
VLC2 [mm]
  rect 5x2 smd: 1(2.54,1.016) 2(2.54,4.572)
  silkscreen extent -0.11,2.62 5.19,3.07

## Part data
C1 C3 C5 C8 C9 C10 C11 C12 C13 C14 C15 C16 C17 C20 C21 C22 C26 C29 C32 C33 C35 C36 C37 C38 C41 C42 C43 C44 C45 C48 C56 C59 C61 C62 C63 C64 C65 C66 C67 C68 C69 C70 C71 C72 C73 C75: library part Cap_BP, "Capacitor"
C2 C4 C6 C7 C18 C19 C23 C24 C25 C27 C28 C30 C31 C34 C39 C40 C46 C47 C49 C50 C51 C52 C53 C54 C55 C57 C58 C60 C74 C76 C77: library part Cap_E, "Capacitor"
D1 D2 D4: library part Diode, "Diode"
H1 H2 H3 H11 H19: library part "Header 4"
H4: library part JTAG-ARM, "USB JTAG Programmer"
H5 H13: library part "Header 3", "Header, 3-Pin"
H7 H8 H9 H10 H12 H16 H17: library part "Header 3"
H18 H20 H21: library part "Header 6"
L1 L2 L3 L4 L5 L6: library part Inductor, "Inductor"
LED1 LED5 LED6: library part LED_R, "LED"
LED2 LED4: library part LED_Y, "LED"
LED3: library part LED_G, "LED"
R1 R2 R3 R4 R5 R6 R7 R8 R9 R10 R11 R12 R13 R14 R15 R16 R17 R18 R19 R20 R21 R22 R23 R24 R25 R26 R27 R28 R29 R30 R31 R32 R34 R36 R37 R38 R39 R40 R41 R42 R43 R44 R45 R46 R47 R48 R49 R50 R51 R52 R53 R55 R56 R57 R58 R59 R60 R61 R62 R63 R64 R65 R66 R67 R68 R69 R70 R71 R72 R73 R74 R75 R76 R77 R78 R79 R80 R81 R82 R83 R86 R87 R88 R89 R90: library part Res, "Res"
S1: "Tactile switch"
T1 T2: "NPN SMD Transistor"
U1: "ARM MCU"
U3 U5: library part 1117-3.3V, "3.3V Voltage Regulator"
U6: "1Kbit (128 x 8 or 64 x 16), 3-wire Bus Serial Automotive EEPROM, 2.5V, 8-Pin SOIC, Bulk"
U7: "Quad High Speed USB To Multipurpose UART/MPSSE IC, QFN-64, Tape and Reel"
X1 X2 X3: library part XTAL, "Crystal Oscillator"

## Free pads (board coordinates)
  round 5 hole 3: 0(2.413,-1.143) 0(2.413,82.042) 0(76.581,-1.143) 0(76.581,82.042)
  round 3.81 hole 3.2: 1(5.334,72.009) 1(9.271,72.009) 1(21.59,74.676) 2(35.179,74.676) 2(72.263,74.549) 2(76.581,74.549) 3(48.641,74.676)

## Via types
v1: diameter 0.635, hole 0.381, Top Layer to Bottom Layer, tented both sides, 252 vias
v2: diameter 0.584, hole 0.33, Top Layer to Bottom Layer, 44 vias
v3: diameter 0.69, hole 0.381, Top Layer to Bottom Layer, tented both sides, 16 vias
v4: diameter 1.016, hole 0.762, Top Layer to Bottom Layer, tented both sides, 11 vias
v5: diameter 1.5, hole 0.8, Top Layer to Bottom Layer, tented both sides, 3 vias
v6: diameter 1.27, hole 0.711, Top Layer to Bottom Layer, tented both sides, 3 vias
v7: diameter 1.524, hole 1.27, Top Layer to Bottom Layer, 2 vias
v8: diameter 0.635, hole 0.381, Top Layer to Bottom Layer, 1 vias

## Nets (pads, with @x,y where several pads share a name; then routed paths per layer and width w, separated by ;. In a path a pad name is that pad's centre, name@x,y a point inside that pad or via, vN(x,y) a via of type N, cw(c..) or ccw(c..) an arc to the next point about the centre after c; other vN are vias at no path point)
1V8_USB: C61.1 C65.1 C66.1 C67.1 U7.12 U7.37 U7.49 U7.64 | length 44.3
  Signal Layer 2 w0.25: v1@8.128,22.781 v1(8.128,22.606) 7.493,21.971 6.779,21.971 5.247,20.439 5.247,19.947 5.672,19.521 9.819,19.521 10.033,19.736 10.523,19.736 10.541,19.718 ; v1(16.129,13.97) 15.811,14.288 12.129,14.288 11.176,13.335 v1(11.049,13.335) 10.922,13.335 10.541,13.716 10.541,19.718 ; v1(16.383,19.812) v1(14.224,19.812) 14.13,19.718 10.541,19.718
  Bottom Layer w0.25: C61.1@7.239,22.606 v1(8.128,22.606) ; C66.1@10.414,9.017 11.255,9.858 U7.12@11.255,12.416 11.255,13.129 v1(11.049,13.335) ; U7.37@11.255,21.366 11.255,21.003 12.446,19.812 v1(14.224,19.812) ; v1(16.129,13.97) 16.129,13.607 15.993,13.471 16.458,13.471 16.47,13.483 16.804,13.483 17.146,13.141 U7.64@17.48,13.141 18.228,13.141 C67.1@18.796,12.573 ; v1(16.383,19.812) 16.637,19.812 16.827,20.002 16.827,20.51 16.958,20.641 U7.49@17.48,20.641 17.48,20.655 18.034,21.209 C65.1@18.415,21.209
3V3_IRFS: C39.2 C41.2 C42.2 C45.2 C48.1 R45.2 R46.2 R48.2 U2.24 U5.2 | length 79.6
  Signal Layer 2 w0.5: v1(20.447,37.211) 20.616,37.042 23.029,37.042 v1(23.114,36.957) ; v1(42.926,18.796) 43.818,19.688 45.85,19.688 49.022,22.86 v1(49.149,22.86)
  Signal Layer 2 w0.7: v1(45.847,29.464) v1@47.244,28.067
  Bottom Layer w0.3: 28.868,36.333 28.868,36.361 30.177,37.67 30.177,38.095 30.283,38.201 U2.24@30.283,39.243
  Bottom Layer w0.5: v1(23.114,36.957) 24.763,36.957 25.61,36.11 26.714,36.11 26.937,36.333 28.868,36.333 ; C45.2@44.245,31.877 44.245,31.066 v1(45.847,29.464) ; U5.2@48.881,29.577 U5.2@48.881,24.13 49.149,23.862 v1(49.149,22.86)
  Bottom Layer w0.7: C39.2@15.113,36.625 C41.2@18.669,36.625 ; C41.2@18.796,36.752 19.255,37.211 v1(20.447,37.211) 20.447,36.695 20.868,36.273 20.868,35.757 26.78,29.845 26.924,29.845 ; C48.1@27.559,30.48 26.924,29.845 ; C42.2@34.544,18.62 34.887,18.62 36.038,19.772 ; v1(42.926,18.796) 44.069,19.939 R45.2@44.069,20.144 ; R45.2@43.885,19.96 43.829,20.017 40.81,20.017 40.528,19.735 39.863,19.735 39.582,20.017 R46.2@39.116,20.017 R48.2@37.338,20.017 37.119,20.236 36.684,19.802 36.068,19.802 36.038,19.772 ; v1(47.371,28.067) 47.371,28.589 U5.2@48.881,30.099 ; 26.924,29.845 28.702,28.067 28.702,24.621 30.013,23.31 31.148,23.31 31.805,22.653 32.608,22.653 32.708,22.553 32.708,22.442 33.216,21.934 33.216,21.885 33.729,21.372 35.546,21.372 35.546,20.264 36.038,19.772
3V3_STM: C9.2 C10.2 C11.2 C68.1 C69.1 C70.1 C71.1 H4.1 H21.4 L1.2 L2.2 L5.1 L6.1 R5.2 R58.2 R59.2 R60.2 U1.6 U1.11 U1.19 U1.28 U1.50 U1.75 U1.100 U3.2 U6.6 U6.8 U7.20 U7.31 U7.42 U7.50 U7.56 U8.8 | length 316.4
  Top Layer w0.25: U1.19@20.594,24.686 20.642,24.638 21.789,24.638 21.876,24.725 22.9,24.725 22.918,24.707 ; U1.6@20.594,31.186 21.915,31.186 22.194,31.465 U1.100@22.194,35.286 22.194,35.718 21.717,36.195 v1(21.717,36.322) ; U1.11@20.717,28.702 21.789,28.702 21.876,28.615 22.9,28.615 v1(22.987,28.702) ; v1(22.918,25.331) 22.918,24.707 ; U1.28@23.194,20.086 23.194,24.431 22.918,24.707 ; C10.2@31.496,17.321 31.56,17.257 34.574,17.257 34.736,17.419 34.736,18.649 34.574,18.811 34.194,18.811 U1.50@34.194,20.086 34.194,21.813 34.036,21.971 v1(34.036,22.225) ; v1(42.291,5.715) 42.291,6.201 42.556,6.466 H21.4@43.536,6.466 ; H4.1@49.505,47.701 50.089,47.701 v1(50.8,46.99) ; C9.2@49.608,30.099 49.608,32.467 50.927,33.786 v1(50.927,36.195) ; v1(54.229,1.143) 54.229,4.558 U3.2@54.624,4.953 U3.2@54.624,11.153
  Top Layer w0.3: L2.2@12.705,21.209 L1.2@12.705,23.241 13.589,22.357 13.584,22.352 v1(13.462,22.352) ; v1(14.097,26.416) 14.683,26.416 R5.2@15.191,25.908 ; U1.75@35.816,33.708 36.502,33.708 38.735,35.941 40.513,35.941 42.037,34.417 v1(42.291,34.417)
  Signal Layer 1 w0.25: v1(21.717,36.322) 21.717,30.686 22.987,29.416 v1(22.987,28.702) 22.987,25.4 v1(22.918,25.331) ; v1(34.036,22.225) 34.036,22.129 33.957,22.05 33.957,20.272 36.711,17.518 36.836,17.518 37.203,17.151 37.203,17.026 41.491,12.738 43.932,12.738 50.927,19.733 v1(50.927,36.195) ; 42.291,12.611 v1(42.291,5.715) 49.657,5.715 v1(54.229,1.143) ; v1(42.291,34.417) 47.927,34.417 49.284,35.774 50.506,35.774 v1(50.927,36.195) ; v1(50.8,46.99) 50.927,46.863 50.8,46.736 50.927,46.609 v1(50.927,36.195)
  Signal Layer 1 w0.3: v1(13.462,22.352) 13.589,22.225 13.589,25.908 v1(14.097,26.416) 15.851,26.416 16.834,25.433 19.943,25.433 21.866,23.51 22.736,23.51 23.099,23.873 23.099,24.387 22.918,24.568 v1(22.918,25.331) 23.982,25.331 26.565,22.748 29.364,22.748 29.715,23.099 30.483,23.099 30.707,22.875 32.4,22.875 33.005,23.48 33.785,23.48 34.148,23.117 34.148,22.337 v1(34.036,22.225)
  Signal Layer 2 w0.25: v1(7.112,20.574) 7.127,20.589 7.989,20.589 8.101,20.701 10.922,20.701 11.874,21.653 12.763,21.653 v1(13.462,22.352) ; v1(7.493,14.478) 7.366,14.478 4.572,11.684 4.572,10.033 3.302,8.763 3.175,8.89 v1(3.048,8.89) 3.048,5.969 5.588,3.429 v1(5.588,3.048) 5.588,1.905 5.969,1.524 v1(18.542,1.524) 19.757,1.524 20.97,0.312 21.448,0.312 21.899,0.762 21.899,9.135 23.812,11.049 v1(25.527,11.049) ; v1(22.918,25.331) 24.707,25.331 27.265,22.773 29.043,22.773 29.464,22.352 29.464,19.558 v1(27.94,18.034)
  Bottom Layer w0.25: U8.8@1.27,11.901 1.143,11.774 C69.1@1.143,9.701 1.954,8.89 v1(3.048,8.89) v1@3.175,8.763 ; v1(5.588,3.048) 5.588,3.175 5.954,3.541 5.954,3.586 6.116,3.748 6.161,3.748 6.477,4.064 L5.1@6.477,4.604 ; U7.20@8.479,14.641 v1(7.493,14.478) 1.143,14.478 0.254,15.367 0.254,19.664 2.815,22.225 C70.1@3.937,22.225 4.923,21.239 6.574,21.239 7.112,20.701 v1(7.112,20.574) 7.239,20.574 7.366,20.701 7.926,20.141 U7.31@8.479,20.141 ; U7.42@13.755,21.366 13.755,22.059 v1(13.462,22.352) 14.732,22.352 ; C71.1@14.732,23.368 14.732,22.352 ; L6.1@16.637,4.445 18.542,2.54 v1(18.542,1.524) ; U7.50@17.429,20.141 U7.50@17.48,20.141 18.871,20.141 ; U7.56@17.48,17.141 18.239,17.141 19.344,18.246 19.344,18.28 19.86,18.796 19.894,18.796 ; R58.2@22.606,18.493 21.73,19.369 20.467,19.369 19.894,18.796 ; v1(25.527,11.049) 26.465,11.987 R59.2@26.465,12.192 R60.2@26.465,13.716 28.878,16.129 30.853,16.129 U6.8@31.406,16.129 ; 14.732,22.352 14.751,22.371 16.637,22.371 C68.1@16.637,23.241 17.132,23.736 19.03,23.736 19.192,23.574 19.192,20.462 19.05,20.32 19.05,19.64 19.894,18.796
  Bottom Layer w0.3: U6.6@30.48,18.669 29.854,18.043 29.854,17.129 U6.8@30.853,16.129